# Altium PCB LVDCLINK22v1.PcbDoc
Units mm, origin at the board's own origin, x right, y up, seen from the top; angles counter-clockwise.
Board outline 31.5 x 43.69 mm, 2 copper layers (Top Layer, Bottom Layer); 1 components, 2 nets, 8 pads, 2 vias.
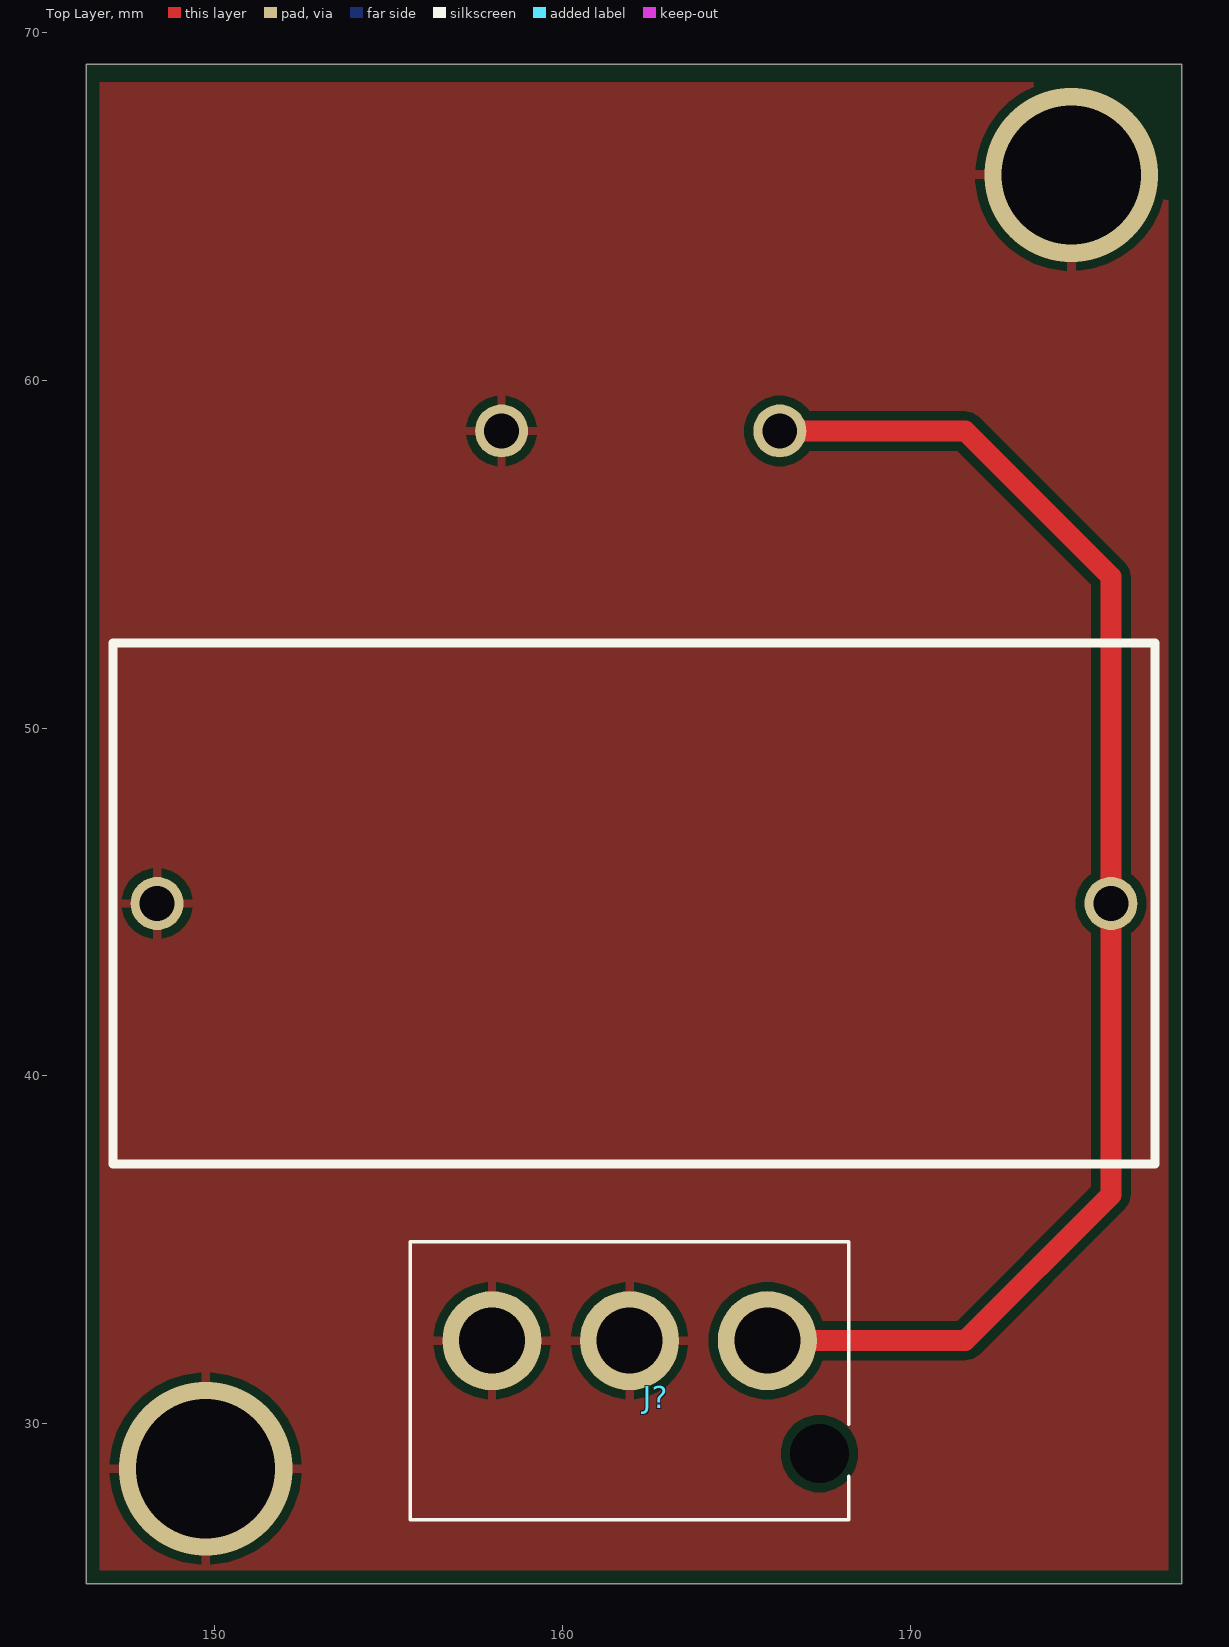
[diagram p0: Top Layer view]
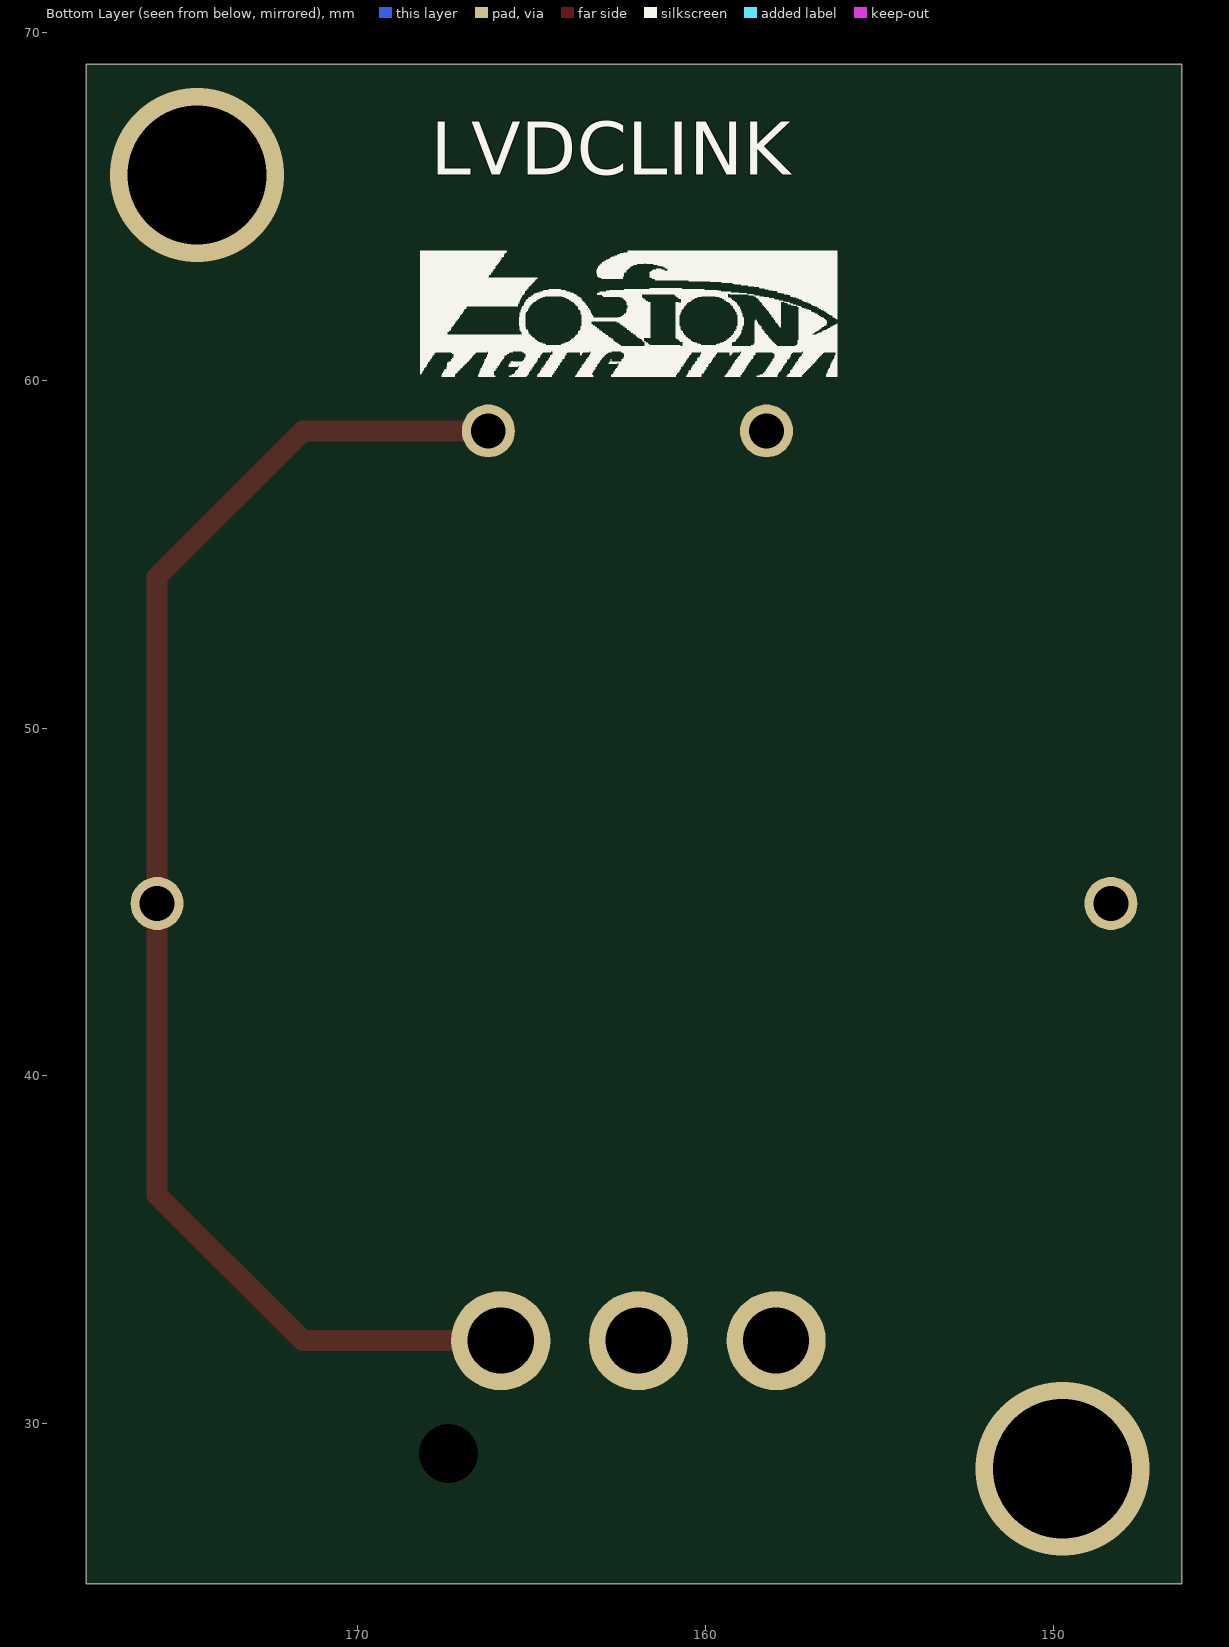
[diagram p1: Bottom Layer view, seen from below]

## Layer stack, top to bottom
Top Solder: solder mask 0.0102, Solder Resist, Dk 3.5
Top Layer: signal copper 0.0356
Dielectric 1: dielectric 0.32, FR-4, Dk 4.8
Bottom Layer: signal copper 0.0356
Bottom Solder: solder mask 0.0102, Solder Resist, Dk 3.5

## Board outline
146.304,25.4 177.8,25.4 177.8,69.088 146.304,69.088

## Design rules (kind name [scope] priority, off if disabled: settings)
Clearance [All] p1: gap=0.254 ignorepadtopadclearanceinfootprint=FALSE except(0: Arc-Hole Track-Hole SMDPad-Hole THPad-Hole Via-Hole Fill-Hole Poly-Hole Region-Hole Text-Hole)
PolygonConnect [All] p1: connectstyle=Relief reliefconductorwidth=0.254 reliefentries=4 polygonreliefangle="90 Angle" airgapwidth=0.254
RoutingVias [All] p1: holewidth=0.711 width=1.27 viastyle="Through Hole" minholewidth=0.711 minwidth=1.27 maxholewidth=0.711 maxwidth=1.27
SolderMaskExpansion [All] p1: expansion=0.102 istentingtop=FALSE
Width [All] p1: maxlimit=0.6 minlimit=0.6 preferedwidth=0.6
30 further rules are at their usual default settings.

## Components (designator, comment, footprint, x,y, rotation, side; value= is the part's Value field where it differs from the comment)
J? "DF63-3P-3.96DS" DF633P396DS 157.965,32.385 r180 top

## Footprints (in the part's own frame and the unit in brackets; to place one, negate y for a bottom-side part, rotate by r counter-clockwise, add the part's x,y. Pads: shape width x height; smd on the part's side, far side on the other; paste and mask are expansions set on the pad)
DF633P396DS [mm]
  round 2.85 hole 1.9: 1(0,0) 2(-3.96,0) 3(-7.92,0)
  round 0.85 hole 1.7 unplated: MH1(-9.42,3.25)
  silkscreen extent -10.26,-2.85 2.35,5.15, body extent -10.27,-2.85 2.35,5.15, height 10.1

## Part data
J?: "Connector", Manufacturer_Name=Hirose, Mouser Part Number=798-DF63-3P-3.96DS, Datasheet Link=https://www.mouser.co.uk/datasheet/2/185/DF63_catalog-1066197.pdf, Height=10mm, Manufacturer_Part_Number=DF63-3P-3.96DS, Mouser Price/Stock=https://www.mouser.co.uk/ProductDetail/Hirose-Connector/DF63-3P-396DS?qs=vcbW%252B4%252BSTIosvrYGqXVyWg%3D%3D

## Free pads (board coordinates)
  round 1.524 hole 1: 4(148.336,44.958) 5(158.242,58.547) 6(166.243,58.547) 7(175.768,44.958)

## Via types
v1: diameter 5, hole 4, Top Layer to Bottom Layer, 2 vias

## Nets (pads, with @x,y where several pads share a name; then routed paths per layer and width w, separated by ;. In a path a pad name is that pad's centre, name@x,y a point inside that pad or via, vN(x,y) a via of type N, cw(c..) or ccw(c..) an arc to the next point about the centre after c; other vN are vias at no path point)
+12: J?.3 pad.6 pad.7 | length 40.7
  Top Layer w0.6: J?.3 171.577,32.385 175.768,36.576 pad.7 175.768,54.356 171.577,58.547 pad.6
GND: J?.1 J?.2 pad.4 pad.5
  other v1: 149.733,28.702 174.625,65.913
pads on no net: J?.MH1

## Polygon pours and split planes (outlines as drawn)
GND on Top Layer "NONET_L-01_P-001" (solid, pour order 0): 146.685,68.58 146.685,25.781 177.419,25.781 177.419,68.58

## Silkscreen, mask and mechanical layers (free items; w line width, h text height)
Top Overlay:
  lines w0.254: 147.066,37.465 177.038,37.465 177.038,52.451 147.066,52.451 147.066,37.465
Bottom Overlay:
  drawing of 2 lines, arcs and shapes, not listed
  text "LVDCLINK" at 167.894,65.913 h1.52